# Altium PCB transfer.PcbDoc
Units mil, origin at the board's own origin, x right, y up, seen from the top; angles counter-clockwise.
Board outline 2680 x 2845 mil, 2 copper layers (Top Layer, Bottom Layer); 10 components, 119 nets, 256 pads, 133 vias.
Unrouted connection lines stored in the file: 24.
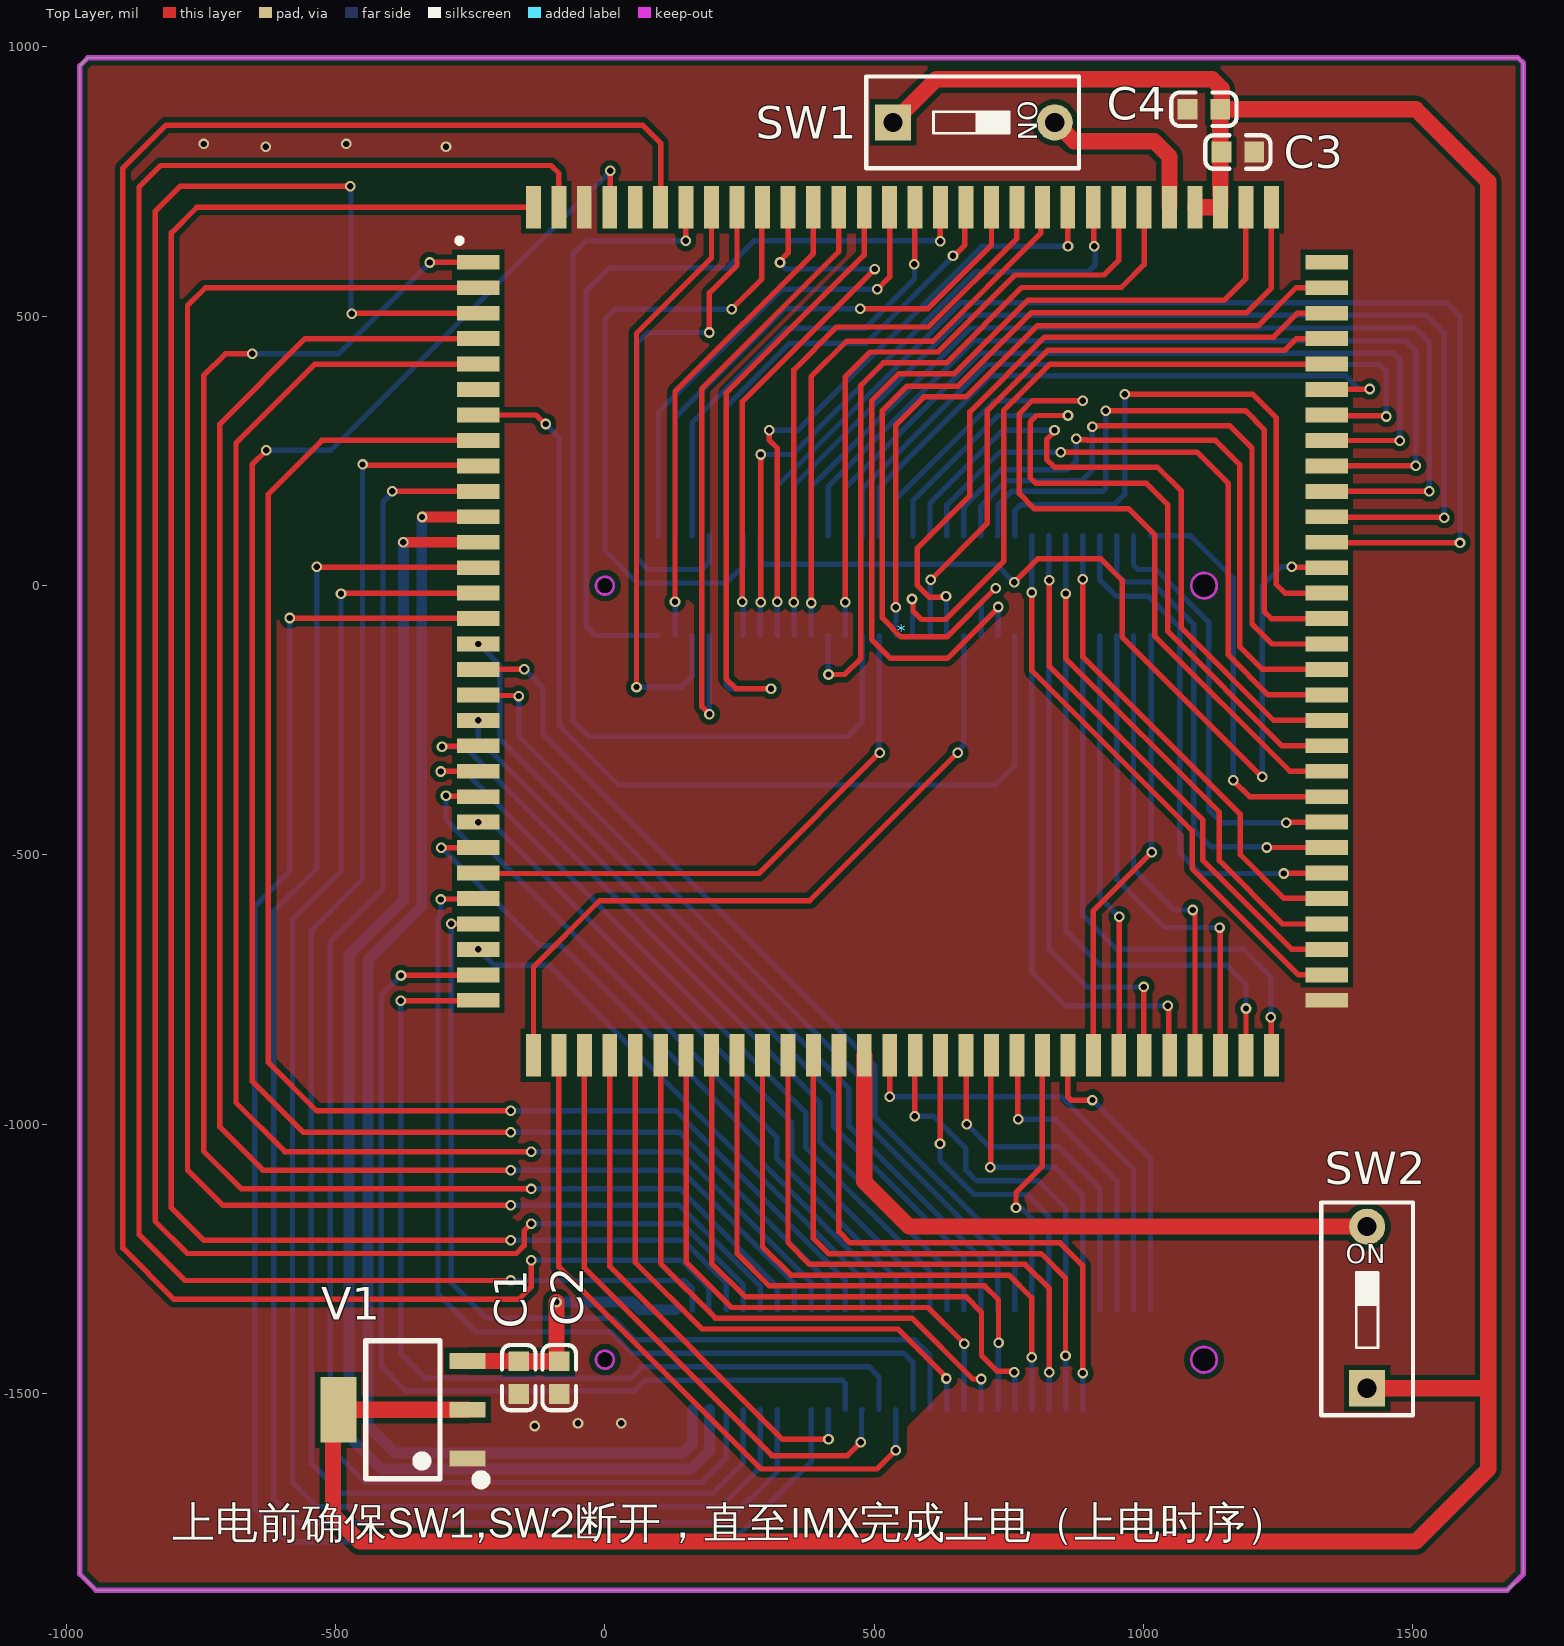
[diagram p0: Top Layer view]
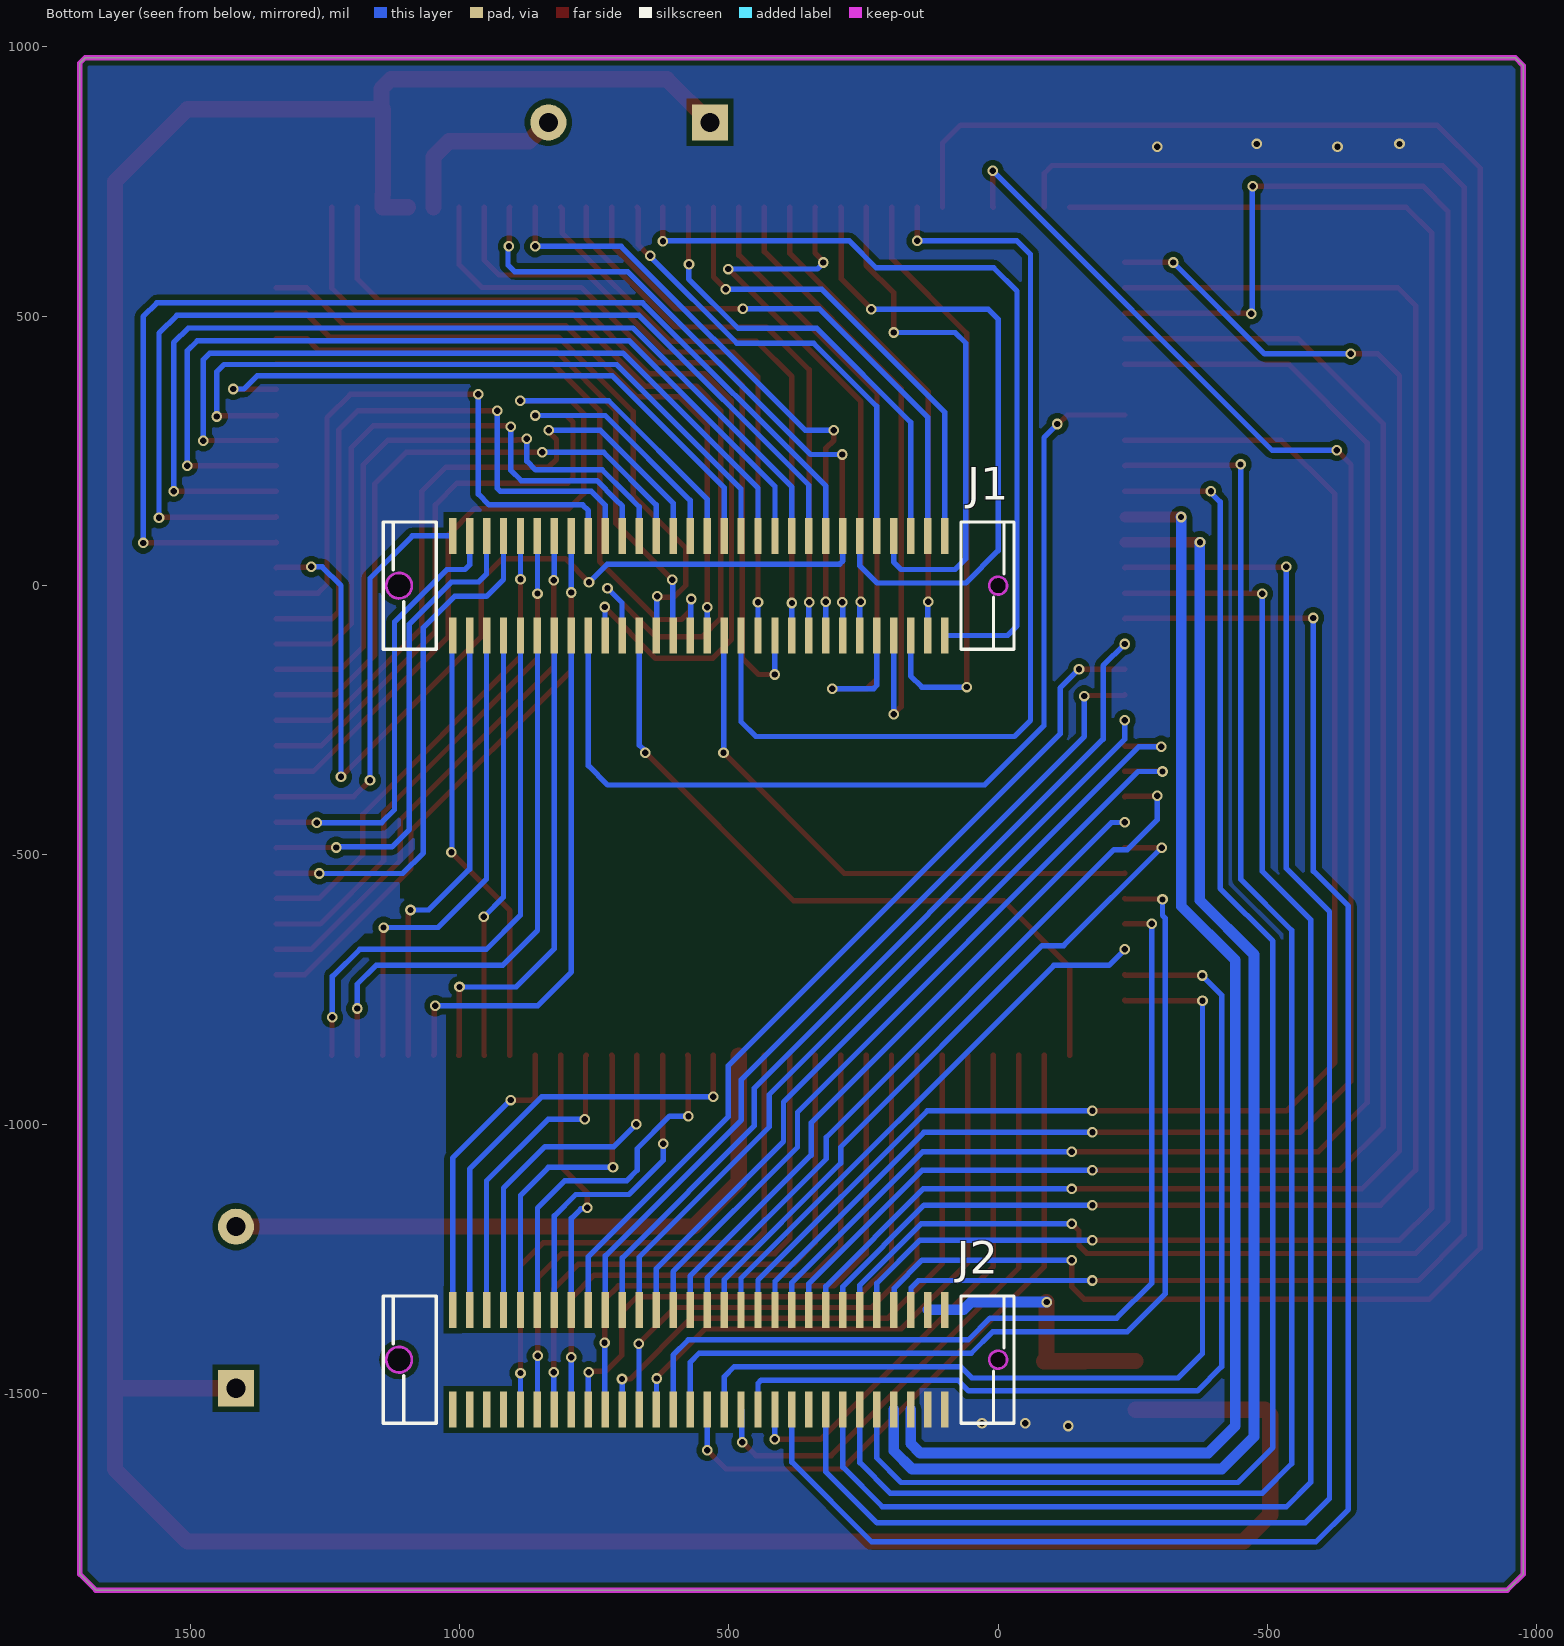
[diagram p1: Bottom Layer view, seen from below]
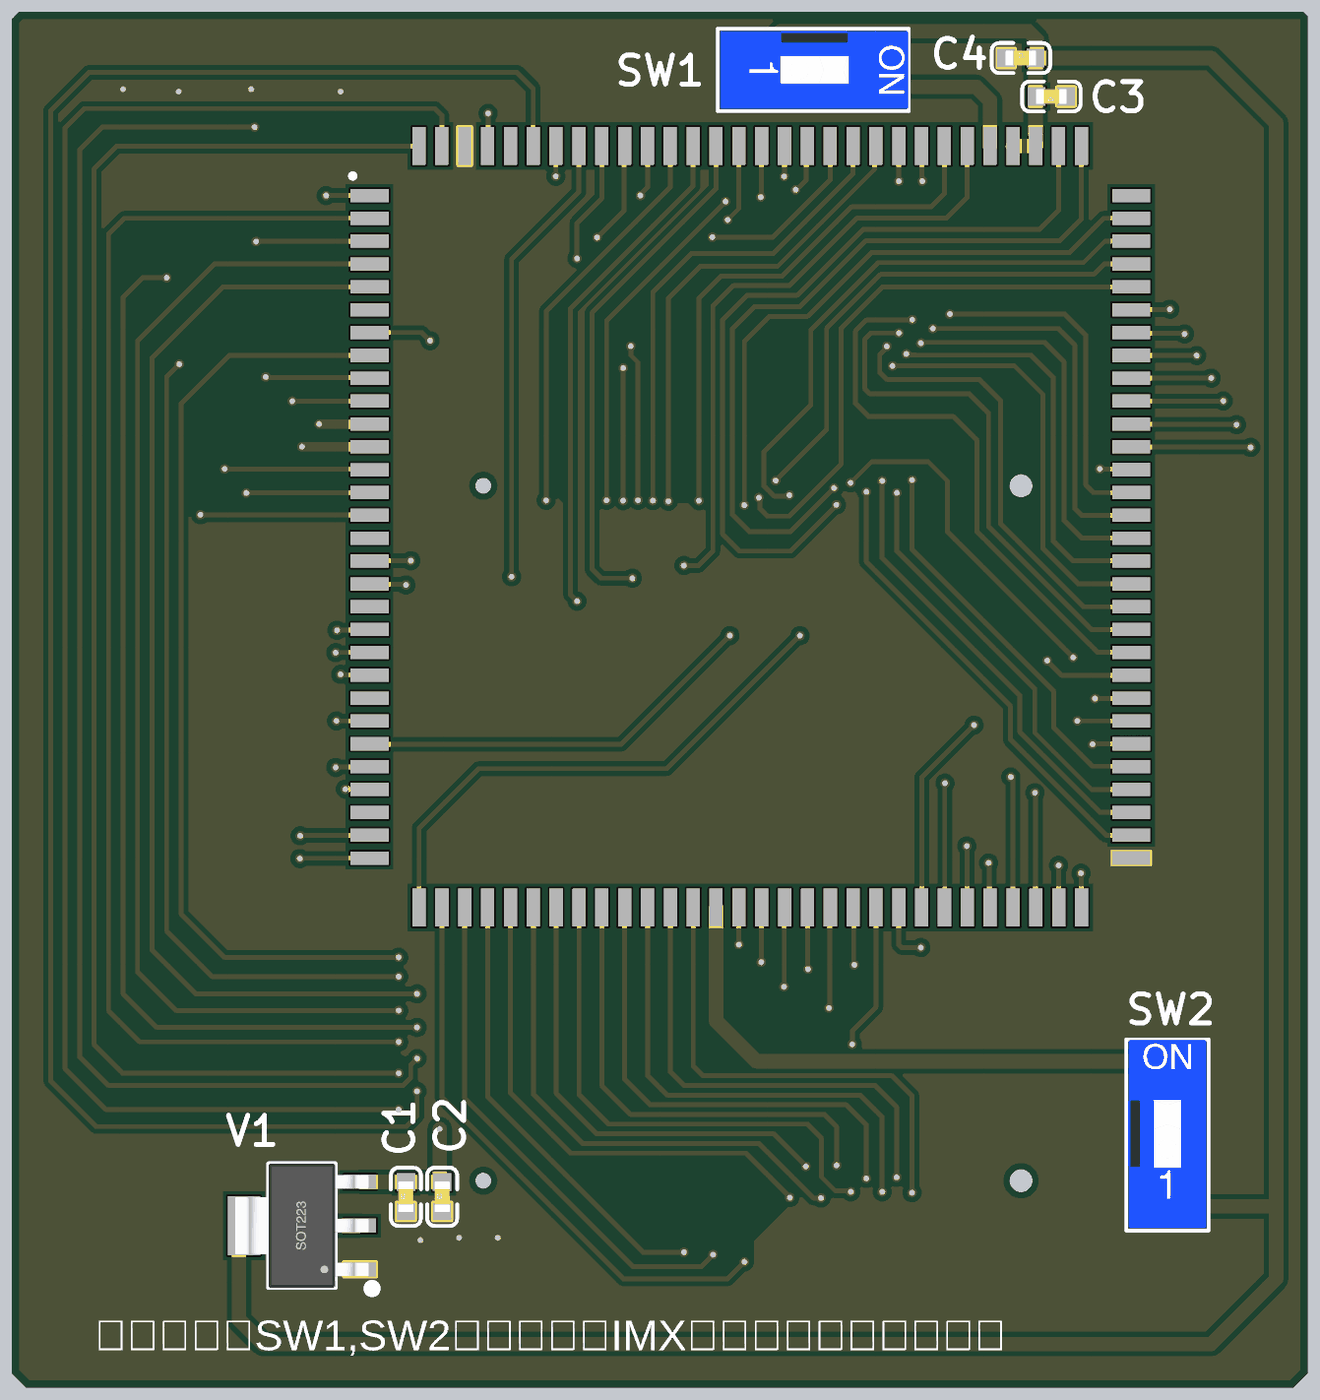
[diagram p2: 3D render of the assembled board from above, using the file's embedded part models]

## Layer stack, top to bottom
Top Solder: solder mask 0.4, Solder Resist, Dk 3.5
Top Layer: signal copper 1.4
Dielectric 1: dielectric 12.6, FR-4, Dk 4.8
Bottom Layer: signal copper 1.4
Bottom Solder: solder mask 0.4, Solder Resist, Dk 3.5

## Board outline
-975,-1835 -975,965 -960,980 1695,980 1705,970 1705,-1835 1675,-1865 -945,-1865
cut-out: -16.54,0 ccw(c0,0) 0,-16.54 ccw(c0,0) 16.54,0 ccw(c0,0) 0,16.54 ccw(c0,0)
cut-out: 1088.4,0 ccw(c1112.2,0) 1112.2,-23.8 ccw(c1112.2,0) 1136,0 ccw(c1112.2,0) 1112.2,23.8 ccw(c1112.2,0)
cut-out: -16.54,-1437.01 ccw(c0,-1437.01) 0,-1453.54 ccw(c0,-1437.01) 16.54,-1437.01 ccw(c0,-1437.01) 0,-1420.47 ccw(c0,-1437.01)
cut-out: 1088.4,-1437.01 ccw(c1112.2,-1437.01) 1112.2,-1460.81 ccw(c1112.2,-1437.01) 1136,-1437.01 ccw(c1112.2,-1437.01) 1112.2,-1413.21 ccw(c1112.2,-1437.01)

## Design rules (kind name [scope] priority, off if disabled: settings)
Clearance [All] p1: gap=10 ignorepadtopadclearanceinfootprint=FALSE except(0: Arc-Hole Track-Hole SMDPad-Hole THPad-Hole Via-Hole Fill-Hole Poly-Hole Region-Hole Text-Hole)
HoleToHoleClearance [All] p1: gap=6 allowstackedmicrovias=TRUE
MinimumSolderMaskSliver [All] p1: minsoldermaskwidth=6
PolygonConnect [All] p1: thpad.connectstyle=Relief thpad.reliefconductorwidth=10 thpad.reliefentries=4 thpad.polygonreliefangle="90 Angle" thpad.airgapwidth=10 smdpad.connectstyle=Direct smdpad.reliefconductorwidth=10 smdpad.reliefentries=4 smdpad.polygonreliefangle="90 Angle" smdpad.airgapwidth=10 via.connectstyle=Direct via.reliefconductorwidth=10 via.reliefentries=4 via.polygonreliefangle="90 Angle" via.airgapwidth=10
RoutingVias [All] p1: holewidth=28 width=50 viastyle="Through Hole" minholewidth=28 minwidth=50 maxholewidth=28 maxwidth=50
SilkToSilkClearance [All] p1: silktosilkclearance=6
SilkToSolderMaskClearance [IsPad] p1: minsilkscreentomaskgap=6 clearancetoexposedcopper=TRUE
SolderMaskExpansion [All] p1: expansion=4 istentingtop=FALSE
Width [All] p1: maxlimit=50 minlimit=10 preferedwidth=10
26 further rules are at their usual default settings.

## Components (designator, comment, footprint, x,y, rotation, side; value= is the part's Value field where it differs from the comment)
* "Connector_stamp_imx6ull" Connector_stamp_imx6ull 640,-20 r270 top locked
C1 "1uF" 0603_C_STD -160,-1470.32 r90 top
C2 "0.1uF" 0603_C_STD -85,-1470.32 r90 top
C3 "1uF" 0603_C_STD 1175,805 r180 top
C4 "0.1uF" 0603_C_STD 1111.93,884.46 r0 top
J1 "3710M060046G3FT01" 3710F060046G3FT01 99.41,-92.52 r270 bottom
J2 "3710M060046G3FT01" 3710F060046G3FT01 99.41,-1529.53 r270 bottom
SW1 "CSW-1P" "CSW DIP-1P" 685,860 r270 top
SW2 "CSW-1P" "CSW DIP-1P" 1415,-1340 r0 top
V1 "AMS1117-3V3" SOT223_L -375,-1530 r90 top

## Footprints (in the part's own frame and the unit in brackets; to place one, negate y for a bottom-side part, rotate by r counter-clockwise, add the part's x,y. Pads: shape width x height; smd on the part's side, far side on the other; paste and mask are expansions set on the pad)
0603_C_STD [mm]
  rect 0.93x0.98 smd: 1(-0.77,0) 2(0.77,0)
  silkscreen extent -1.53,-0.79 1.54,0.79, body extent -0.8,-0.4 0.8,0.4, height 0.3
3710F060046G3FT01 [mm]
  rect 1.7x0.35 smd: 1(-4.7,0) 2(-4.7,-0.8) 3(-4.7,-1.6) 4(-4.7,-2.4) 5(-4.7,-3.2) 6(-4.7,-4) 7(-4.7,-4.8) 8(-4.7,-5.6) 9(-4.7,-6.4) 10(-4.7,-7.2) 11(-4.7,-8) 12(-4.7,-8.8) 13(-4.7,-9.6) 14(-4.7,-10.4) 15(-4.7,-11.2) 16(-4.7,-12) 17(-4.7,-12.8) 18(-4.7,-13.6) 19(-4.7,-14.4) 20(-4.7,-15.2) 21(-4.7,-16) 22(-4.7,-16.8) 23(-4.7,-17.6) 24(-4.7,-18.4) 25(-4.7,-19.2) 26(-4.7,-20) 27(-4.7,-20.8) 28(-4.7,-21.6) 29(-4.7,-22.4) 30(-4.7,-23.2) 31(0,-23.2) 32(0,-22.4) 33(0,-21.6) 34(0,-20.8) 35(0,-20) 36(0,-19.2) 37(0,-18.4) 38(0,-17.6) 39(0,-16.8) 40(0,-16) 41(0,-15.2) 42(0,-14.4) 43(0,-13.6) 44(0,-12.8) 45(0,-12) 46(0,-11.2) 47(0,-10.4) 48(0,-9.6) 49(0,-8.8) 50(0,-8) 51(0,-7.2) 52(0,-6.4) 53(0,-5.6) 54(0,-4.8) 55(0,-4) 56(0,-3.2) 57(0,-2.4) 58(0,-1.6) 59(0,-0.8) 60(0,0)
  Keep-Out Layer circle w0.127: c-2.35,-25.725 r0.6
  Keep-Out Layer circle w0.127: c-2.35,2.525 r0.42
  silkscreen extent -5.35,-26.47 0.65,3.27
Connector_stamp_imx6ull [mm]
  rect 0.7x2 smd: J1_1(-15.755,-22.227) J1_2(-14.555,-22.227) J1_3(-13.355,-22.227) J1_4(-12.155,-22.227) J1_5(-10.955,-22.227) J1_6(-9.755,-22.227) J1_7(-8.555,-22.227) J1_8(-7.355,-22.227) J1_9(-6.155,-22.227) J1_10(-4.955,-22.227) J1_11(-3.755,-22.227) J1_12(-2.555,-22.227) J1_13(-1.355,-22.227) J1_14(-0.155,-22.227) J1_15(1.045,-22.227) J1_16(2.245,-22.227) J1_17(3.445,-22.227) J1_18(4.645,-22.227) J1_19(5.845,-22.227) J1_20(7.045,-22.227) J1_21(8.245,-22.227) J1_22(9.445,-22.227) J1_23(10.645,-22.227) J1_24(11.845,-22.227) J1_25(13.045,-22.227) J1_26(14.245,-22.227) J1_27(15.445,-22.227) J1_28(16.645,-22.227) J1_29(17.845,-22.227) J1_30(19.045,-22.227) J3_1(19.045,17.777) J3_2(17.845,17.777) J3_3(16.645,17.777) J3_4(15.445,17.777) J3_5(14.245,17.777) J3_6(13.045,17.777) J3_7(11.845,17.777) J3_8(10.645,17.777) J3_9(9.445,17.777) J3_10(8.245,17.777) J3_11(7.045,17.777) J3_12(5.845,17.777) J3_13(4.645,17.777) J3_14(3.445,17.777) J3_15(2.245,17.777) J3_16(1.045,17.777) J3_17(-0.155,17.777) J3_18(-1.355,17.777) J3_19(-2.555,17.777) J3_20(-3.755,17.777) J3_21(-4.955,17.777) J3_22(-6.155,17.777) J3_23(-7.355,17.777) J3_24(-8.555,17.777) J3_25(-9.755,17.777) J3_26(-10.955,17.777) J3_27(-12.155,17.777) J3_28(-13.355,17.777) J3_29(-14.555,17.777) J3_30(-15.755,17.777)
  rect 2x0.7 smd: J2_1(21.642,-19.627) J2_2(21.642,-18.427) J2_3(21.642,-17.227) J2_4(21.642,-16.027) J2_5(21.642,-14.827) J2_6(21.642,-13.627) J2_7(21.642,-12.427) J2_8(21.642,-11.227) J2_9(21.642,-10.027) J2_10(21.642,-8.827) J2_11(21.642,-7.627) J2_12(21.642,-6.427) J2_13(21.642,-5.227) J2_14(21.642,-4.027) J2_15(21.642,-2.827) J2_16(21.642,-1.627) J2_17(21.642,-0.427) J2_18(21.642,0.773) J2_19(21.642,1.973) J2_20(21.642,3.173) J2_21(21.642,4.373) J2_22(21.642,5.573) J2_23(21.642,6.773) J2_24(21.642,7.973) J2_25(21.642,9.173) J2_26(21.642,10.373) J2_27(21.642,11.573) J2_28(21.642,12.773) J2_29(21.642,13.973) J2_30(21.642,15.173) J4_1(-18.352,15.169) J4_2(-18.352,13.969) J4_3(-18.352,12.769) J4_4(-18.352,11.569) J4_5(-18.352,10.369) J4_6(-18.352,9.169) J4_7(-18.352,7.969) J4_8(-18.351,6.769) J4_9(-18.351,5.569) J4_10(-18.351,4.369) J4_11(-18.351,3.169) J4_12(-18.351,1.969) J4_13(-18.351,0.769) J4_14(-18.351,-0.431) J4_15(-18.351,-1.631) J4_16(-18.351,-2.831) J4_17(-18.351,-4.031) J4_18(-18.351,-5.231) J4_19(-18.351,-6.431) J4_20(-18.351,-7.631) J4_21(-18.351,-8.831) J4_22(-18.351,-10.031) J4_23(-18.351,-11.231) J4_24(-18.351,-12.431) J4_25(-18.351,-13.631) J4_26(-18.351,-14.831) J4_27(-18.351,-16.031) J4_28(-18.351,-17.231) J4_29(-18.351,-18.431) J4_30(-18.351,-19.631)
  silkscreen extent -16.89,-23.23 -16.66,-23
"CSW DIP-1P" [mm] "4.1*9.9*7mm"
  rect 1.7x1.7 hole 0.9: 1(0,-3.81)
  round 1.7 hole 0.9: 2(0,3.81)
  silkscreen extent -2.16,-5.08 2.16,4.95, body extent -2.05,-4.95 2.05,4.95, height 6.65
SOT223_L [mm] "6.4x7x1.6mm(长宽高)"
  rect 0.75x1.7 smd: 1(-2.3,-3.048) 2(0,-3.048) 3(2.3,-3.048)
  rect 3.1x1.7 smd: 2(0,3.048)
  silkscreen extent -3.5,-3.88 3.25,1.75, body extent -3.25,-3.51 3.25,3.51, height 1.65

## Part data
C1 C2 C3 C4: library part 0603_C_STD, "贴片电容", Package=0603, SuppliersPartNumber=C1685, ComponentLink1Description=供应商链接, ComponentLink1URL=http://www.szlcsc.com/product/details_2037.html, Supplier=LC
J1 J2: library part 3710F, "3710F060046G3FT01"
SW1 SW2: "1路编码开关", BOM名称=1路编码开关, 学习资源=www.ooocke.com, 版权归属=源创客
V1: library part AMS1117, "三端稳压芯片", BOM名称=稳压芯片, 学习资源=www.ooocke.com, 版权归属=源创客

## Via types
v1: diameter 19.68, hole 11.81, Top Layer to Bottom Layer, tented both sides, 133 vias

## Nets (pads, with @x,y where several pads share a name; then routed paths per layer and width w, separated by ;. In a path a pad name is that pad's centre, name@x,y a point inside that pad or via, vN(x,y) a via of type N, cw(c..) or ccw(c..) an arc to the next point about the centre after c; other vN are vias at no path point)
BOOT_MODE0: *.J1_2 J2.7 | length 3354.9
  Top Layer w10: *.J1_2 -741.97,553.03 -775,520 -775,-1085 -710,-1150 v1(-175,-1150)
  Bottom Layer w10: v1(-175,-1150) 137.33,-1150 288.39,-1301.05 J2.7
BOOT_MODE1: *.J1_1 J2.8 | length 3249.5
  Top Layer w10: v1(-654.75,430.25) -704.75,430.25 -745,390 -745,-1050 -675,-1120 v1(-136.92,-1120) ; v1(-325,600) -324.72,600.28 *.J1_1
  Bottom Layer w10: v1(-654.75,430.25) -494.75,430.25 v1(-325,600) ; v1(-136.92,-1120) 139.14,-1120 319.88,-1300.74 J2.8
CSI_DATA0: *.J4_17 J1.56 | length 1250.6
  Top Layer w10: v1(308.32,-191.14) 243.11,-191.14 225,-173.03 225,357.24 481.32,613.55 *.J4_17
  Bottom Layer w10: J1.56 225.39,-185.28 231.25,-191.14 v1(308.32,-191.14)
CSI_DATA1: *.J4_18 J1.57 | length 1198.4
  Top Layer w10: v1(193.99,-238.66) 180,-224.66 180,366.09 434.07,620.16 *.J4_18
  Bottom Layer w10: J1.57 193.94,-92.57 193.94,-238.61 v1(193.99,-238.66)
CSI_DATA2: *.J4_15 J1.3 | length 867.2
  Top Layer w10: v1(574.01,596.91) 574.91,597.81 574.91,701.6 *.J4_15
  Bottom Layer w10: J1.3 162.4,303.34 336.56,477.5 482.5,477.5 574.59,569.59 574.59,596.33 v1(574.01,596.91)
CSI_DATA3: *.J4_19 J1.59 | length 901.8
  Top Layer w10: v1(130,-30.21) 130,360.06 386.83,616.89 *.J4_19
  Bottom Layer w10: v1(130,-30.21) 130.45,-30.66 130.45,-92.07 J1.59
CSI_DATA4: *.J4_20 J1.55 | length 1073.8
  Top Layer w10: v1(255,-30) 255,341.77 v1(500.97,587.74) ; v1(325,600) 325,602.62 340,617.62 340,702.08 *.J4_20
  Bottom Layer w10: v1(255,-30) 256.89,-31.89 J1.55 ; v1(325,600) 325,598.44 335.7,587.74 v1(500.97,587.74)
CSI_DATA5: *.J4_21 J1.6 | length 1236.2
  Top Layer w10: v1(235.43,513.45) 291.17,569.18 291.17,701.33 *.J4_21
  Bottom Layer w10: v1(235.43,513.45) 18.58,513.45 0,494.87 0,65 60,5 225,5 256.89,36.89 J1.6
CSI_DATA6: *.J4_22 J1.4 | length 992.4
  Top Layer w10: v1(193.81,469.98) 193.81,543.5 245.05,594.74 245.05,702.45 *.J4_22
  Bottom Layer w10: v1(193.81,469.98) 79.98,469.98 60,450 60,50 80,30 180,30 193.9,43.9 J1.4
CSI_DATA7: *.J4_23 J1.58 | length 1136
  Top Layer w10: v1(58.54,-188.28) 58.54,468.54 197.85,607.85 *.J4_23
  Bottom Layer w10: v1(58.54,-188.28) 141.72,-188.28 162.4,-167.6 J1.58
CSI_HSYNC: *.J4_16 J1.1 | length 892.1
  Top Layer w10: v1(505.51,550) 528.56,573.05 *.J4_16
  Bottom Layer w10: J1.1 99.41,322.02 327.39,550 v1(505.51,550)
CSI_MCLK: *.J4_12 J1.2 | length 1009.4
  Top Layer w10: v1(473.83,514) 599,514 717.54,632.54 *.J4_12
  Bottom Layer w10: J1.2 130.91,312.92 331.98,514 v1(473.83,514)
CSI_PIXCLK: *.J4_13 J1.5 | length 878.7
  Top Layer w10: v1(646.09,612.17) 647.78,612.17 668.04,632.42 668.04,700.24 *.J4_13
  Bottom Layer w10: J1.5 225.39,332.91 342.49,450 485,450 646.09,611.09 v1(646.09,612.17)
CSI_VSYNC: *.J4_14 J1.60 | length 1522.7
  Top Layer w10: v1(622.36,639.65) 622.7,639.99 622.7,702.16 *.J4_14
  Bottom Layer w10: J1.60 -17.48,-92.52 -35,-75 -35,546.76 8.24,590 226.36,590 276.36,640 622.01,640 v1(622.36,639.65)
DC5V: C1.2 C2.2 J2.1 J2.2 V1.3 | length 509.2
  Top Layer w30: V1.3 -160.55,-1439.45 C1.2 C2.2 -90,-1435 v1(-90,-1330)
  Bottom Layer w20: v1(-90,-1330) 50,-1330 64.49,-1344.49 J2.1 J2.2
ENET1_CRS_DV: *.J2_16 J2.25 | length 676.8
  Top Layer w10: v1(575,-985) 575.48,-984.52 575.48,-872.54 *.J2_16
  Bottom Layer w10: v1(575,-985) 610,-985 670,-1045 670,-1085 689.84,-1104.84 804.84,-1104.84 855.31,-1155.31 J2.25
ENET1_RXD0: *.J2_19 J2.26 | length 615
  Top Layer w10: v1(715,-1080) 716.34,-1078.66 716.34,-873.41 *.J2_19
  Bottom Layer w10: v1(715,-1080) 835,-1080 886.81,-1131.81 J2.26
ENET1_RXD1: *.J2_17 J2.24 | length 614.5
  Top Layer w10: v1(621.95,-1035.79) 622.57,-1035.17 622.57,-872.69 *.J2_17
  Bottom Layer w10: v1(621.95,-1035.79) 621.95,-1066.95 685.32,-1130.32 784.2,-1130.32 823.82,-1169.94 J2.24
ENET1_RXER: *.J2_22 J2.30 | length 559.2
  Top Layer w10: *.J2_22 859.42,-949.14 865.28,-955 v1(905,-955)
  Bottom Layer w10: v1(905,-955) 1012.8,-1062.8 J2.30
ENET1_TX_CLK: *.J2_15 J2.29 | length 848.2
  Top Layer w10: *.J2_15 v1(528.71,-948.71) v1@530,-950
  Bottom Layer w10: v1(528.71,-948.71) 847,-948.71 981.3,-1083.02 J2.29
ENET1_TXD0: *.J2_21 J2.23 | length 510.6
  Top Layer w10: v1(763.13,-1155.16) 763.13,-1126.87 812.18,-1077.82 *.J2_21
  Bottom Layer w10: v1(763.13,-1155.16) 764.98,-1157.01 774.83,-1157.01 792.32,-1174.5 J2.23
ENET1_TXD1: *.J2_20 J2.28 | length 589.1
  Top Layer w10: *.J2_20 766.15,-873.28 766.15,-989.54 v1(767.36,-990.75)
  Bottom Layer w10: v1(767.36,-990.75) 835.75,-990.75 949.8,-1104.8 J2.28
ENET1_TXEN: *.J2_18 J2.27 | length 650
  Top Layer w10: *.J2_18 671.05,-872.67 671.05,-998.97 v1(671.65,-999.57)
  Bottom Layer w10: v1(671.65,-999.57) 713.4,-1041.32 841.32,-1041.32 918.31,-1118.31 J2.27
ENET2_CRS_DV: *.J2_28 J1.33 | length 918.8
  Top Layer w10: v1(1141.01,-634.75) 1141.95,-635.68 1141.95,-871.13 *.J2_28
  Bottom Layer w10: J1.33 949.8,-544.8 1039.75,-634.75 v1(1141.01,-634.75)
ENET2_RXD0: *.J2_26 J1.38 | length 996.9
  Top Layer w10: v1(1045,-780) 1046.7,-781.7 1046.7,-870.37 *.J2_26
  Bottom Layer w10: J1.38 792.32,-717.32 855,-780 v1(1045,-780)
ENET2_RXD1: *.J2_25 J1.37 | length 914.5
  Top Layer w10: v1(1000,-745) 1000.58,-745.58 1000.58,-871.49 *.J2_25
  Bottom Layer w10: J1.37 823.82,-673.82 895,-745 v1(1000,-745)
ENET2_RXER: *.J2_24 J1.34 | length 795.2
  Top Layer w10: *.J2_24 954.45,-871.52 954.45,-615.55 v1(955,-615)
  Bottom Layer w10: J1.34 918.31,-578.31 v1(955,-615)
ENET2_TX_CLK: *.J2_23 J1.31 | length 825.3
  Top Layer w10: *.J2_23 906.66,-603.34 v1(1015,-495)
  Bottom Layer w10: J1.31 1013.9,-93.62 1013.9,-493.9 v1(1015,-495)
ENET2_TXD0: *.J2_29 J1.36 | length 1055.9
  Top Layer w10: v1(1190,-785) 1190.13,-785.13 *.J2_29
  Bottom Layer w10: J1.36 855.32,-640.32 920,-705 1155,-705 1190,-740 v1(1190,-785)
ENET2_TXD1: *.J2_30 J1.35 | length 1063.1
  Top Layer w10: v1(1236.24,-801.29) 1236.8,-801.86 1236.8,-871.5 *.J2_30
  Bottom Layer w10: J1.35 886.81,-611.81 950,-675 1185,-675 1235,-725 1236.24,-725 v1(1236.24,-801.29)
ENET2_TXEN: *.J2_27 J1.32 | length 846.7
  Top Layer w10: v1(1090.99,-602.21) 1090.99,-604.83 1095.32,-609.16 1095.32,-871.75 *.J2_27
  Bottom Layer w10: J1.32 981.3,-526.3 1057.21,-602.21 v1(1090.99,-602.21)
ENET_MDC: *.J1_26 J2.45 | length 1827.3
  Top Layer w10: v1(-305.16,-582.54) -304.3,-581.68 -235.95,-581.68 *.J1_26
  Bottom Layer w10: v1(-305.16,-582.54) -305.16,-612.3 -310,-617.14 -310,-1315 -240,-1385 10,-1385 50,-1425 555,-1425 571.85,-1441.85 J2.45
ENET_MDIO: *.J1_27 J2.44 | length 1762.7
  Top Layer w10: v1(-285.16,-627.43) -284.84,-627.75 -235.42,-627.75 *.J1_27
  Bottom Layer w10: v1(-285.16,-627.43) -285.16,-1294.84 -220,-1360 15,-1360 55,-1400 575,-1400 603.35,-1428.35 J2.44
GND: *.J3_1 *.J4_28 C1.1 C2.1 C3.1 C4.1 J2.59 J2.60 V1.1
  other v1: -130,-1560 -50,-1555 30,-1555 -630,815 -295,815 -745,820 -480,820
GPIO1_IO05: *.J1_25 J1.47 | length 1056.2
  Top Layer w10: *.J1_25 -234.39,-534.29 285.71,-534.29 v1(510,-310)
  Bottom Layer w10: J1.47 509.43,-93.09 509.43,-309.43 v1(510,-310)
GPIO1_IO08: *.J1_23 J2.16 | length 1253.8
  Bottom Layer w10: v1(-235.1,-439.09) -234.44,-439.75 -210.25,-439.75 347.21,-997.21 347.21,-1057.21 571.85,-1281.85 J2.16
JTAG_MOD: *.J1_17 J2.22 | length 1652.1
  Top Layer w10: *.J1_17 -234.78,-155.31 -150.31,-155.31 v1(-150,-155)
  Bottom Layer w10: v1(-150,-155) -115,-190 -115,-275 500.76,-890.76 500.76,-985.76 760.83,-1245.83 J2.22
JTAG_nTRST: *.J1_18 J2.21 | length 1583.8
  Top Layer w10: *.J1_18 -234.03,-203.94 -161.06,-203.94 v1(-160,-205)
  Bottom Layer w10: v1(-160,-205) -160,-280 476.9,-916.9 476.9,-991.9 729.33,-1244.33 J2.21
JTAG_TCK: *.J1_19 J2.19 | length 1467.8
  Bottom Layer w10: v1(-235.1,-250.12) -235.1,-284.9 425.02,-945.02 425.02,-1005.02 666.34,-1246.34 J2.19
JTAG_TDI: *.J1_21 J2.17 | length 1472.5
  Top Layer w10: v1(-305.16,-345) -304.96,-344.8 -235.29,-344.8 *.J1_21
  Bottom Layer w10: v1(-305.16,-345) -260,-345 372.63,-977.63 372.63,-1042.63 603.35,-1273.35 J2.17
JTAG_TDO: *.J1_20 J2.18 | length 1526.4
  Top Layer w10: v1(-302.55,-298.84) -301.81,-298.1 -235.84,-298.1 *.J1_20
  Bottom Layer w10: v1(-302.55,-298.84) -261.16,-298.84 398.57,-958.57 398.57,-1031.89 635,-1268.33 635,-1344.33 J2.18
JTAG_TMS: *.J1_16 J2.20 | length 1622.5
  Bottom Layer w10: v1(-235.1,-108.39) -195,-148.48 -195,-285 452.52,-932.52 452.52,-1002.52 697.83,-1247.83 J2.20
LCD_BL: *.J3_30
LCD_DATA0: *.J3_18 J1.7 | length 1732.3
  Top Layer w10: v1(759.59,6.05) 803.54,50 920,50 960,10 960,-95 v1(1220,-355) ; v1(1275,35) 1275.82,34.18 1339.05,34.18 *.J3_18
  Bottom Layer w10: J1.7 288.39,45.86 294.24,40 725.64,40 v1(759.59,6.05) ; v1(1220,-355) 1220,0 1255,35 v1(1275,35)
LCD_DATA1: *.J3_19 J1.8 | length 2179.5
  Top Layer w10: *.J3_19 1340.52,79.95 1586.69,79.95 v1(1587.34,79.29)
  Bottom Layer w10: J1.8 319.88,184.88 660,525 1561.89,525 1587.34,499.55 v1(1587.34,79.29)
LCD_DATA2: *.J3_20 J1.9 | length 2005.6
  Top Layer w10: *.J3_20 1340.63,127.09 1557.05,127.09 v1(1557.81,126.32)
  Bottom Layer w10: J1.9 351.38,186.38 666.72,501.72 1524.87,501.72 1557.81,468.78 v1(1557.81,126.32)
LCD_DATA3: *.J3_21 J1.10 | length 1838.4
  Top Layer w10: *.J3_21 1340.01,175.24 1530.42,175.24 v1(1530.57,175.39)
  Bottom Layer w10: J1.10 382.87,182.87 678.35,478.35 1503.53,478.35 1530.57,451.31 v1(1530.57,175.39)
LCD_DATA4: *.J3_22 J1.11 | length 1681.6
  Top Layer w10: *.J3_22 1339.96,222.43 1505.45,222.43 v1(1505.54,222.53)
  Bottom Layer w10: J1.11 414.37,184.37 684.42,454.42 1486.92,454.42 1505.54,435.79 v1(1505.54,222.53)
LCD_DATA5: *.J3_23 J1.12 | length 1512.8
  Top Layer w10: *.J3_23 1340,269.45 1475.33,269.45 v1(1475.46,269.32)
  Bottom Layer w10: J1.12 445.87,180.87 696.6,431.6 1463.47,431.6 1475.46,419.6 v1(1475.46,269.32)
LCD_DATA6: *.J3_24 J1.13 | length 1356.4
  Top Layer w10: *.J3_24 1341.3,315.39 1449.08,315.39 v1(1450.51,313.96)
  Bottom Layer w10: J1.13 477.36,179.58 708.23,410.45 1437.31,410.45 1450.51,397.25 v1(1450.51,313.96)
LCD_DATA7: *.J3_25 J1.14 | length 1177.6
  Top Layer w10: *.J3_25 1340.33,364.54 1419.54,364.54 v1(1420,365)
  Bottom Layer w10: J1.14 508.86,182.05 716.65,389.84 1375.16,389.84 1400,365 v1(1420,365)
LCD_DATA8: *.J3_10 J1.15 | length 1661.5
  Top Layer w10: v1(887.33,343.23) 793.23,343.23 769.33,319.33 769.33,170.67 796.93,143.07 971.95,143.07 1020.86,94.17 1020.86,-94.01 1271.44,-344.59 *.J3_10
  Bottom Layer w10: J1.15 540.35,160.67 722.91,343.23 v1(887.33,343.23)
LCD_DATA9: *.J3_11 J1.16 | length 1492.1
  Top Layer w10: v1(859.68,315.94) 801.57,315.94 789.33,303.69 789.33,200.27 799.23,190.36 1004.64,190.36 1045,150 1045,-85.03 1257.31,-297.35 *.J3_11
  Bottom Layer w10: J1.16 571.85,158.32 729.47,315.94 v1(859.68,315.94)
LCD_DATA10: *.J3_12 J1.17 | length 1276.3
  Top Layer w10: v1(834.55,288.29) 834.55,285.67 820,271.12 820,234.48 834.48,220 1025.31,220 1070,175.31 1070,-78.47 1241.63,-250.1 *.J3_12
  Bottom Layer w10: J1.17 603.35,153.35 738.29,288.29 v1@833.89,288.29
LCD_DATA11: *.J3_13 J1.18 | length 1176.1
  Top Layer w10: v1(846.33,247.64) 846.5,247.81 1098.74,247.81 1157.22,189.33 1157.22,-128.85 1231.23,-202.86 *.J3_13
  Bottom Layer w10: J1.18 634.84,149.96 732.52,247.64 v1(846.33,247.64)
LCD_DATA12: *.J3_14 J1.19 | length 1179.3
  Top Layer w10: v1(875,272.66) 876.85,270.8 894.07,270.8 894.87,270 1132.92,270 1178.78,224.14 1178.78,-113.78 1220,-155 1339.25,-155 *.J3_14
  Bottom Layer w10: J1.19 666.34,146.34 690,170 735,215 858.83,215 875,231.17 v1(875,272.66)
LCD_DATA13: *.J3_15 J1.20 | length 1165.2
  Top Layer w10: v1(905,295) 906.57,296.57 1160.25,296.57 1201.2,255.61 1201.2,-71.2 1238.37,-108.37 *.J3_15
  Bottom Layer w10: J1.20 697.83,147.83 710,160 745,195 885.43,195 905,214.57 v1(905,295)
LCD_DATA14: *.J3_16 J1.21 | length 1182.4
  Top Layer w10: v1(930,325) 1188.81,325 1223.91,289.9 1223.91,-48.05 1236.98,-61.13 *.J3_16
  Bottom Layer w10: J1.21 729.67,92.85 729.67,149.67 755,175 924.14,175 930,180.86 v1(930,325)
LCD_DATA15: *.J3_17 J1.22 | length 1157.5
  Top Layer w10: v1(965,355) 1202.79,355 1245.94,311.85 1245.94,2.59 1262.41,-13.88 *.J3_17
  Bottom Layer w10: J1.22 760.83,139.27 771.55,150 945,150 965,170 v1(965,355)
LCD_DATA16: *.J3_2 J1.23 | length 1075.8
  Top Layer w10: v1(792.32,-12.68) 792.32,-157.32 1090,-455 1090,-525 1287.54,-722.54 *.J3_2
  Bottom Layer w10: v1@790,-15 v1(792.32,-12.68) J1.23
LCD_DATA17: *.J3_3 J1.24 | length 1019.4
  Top Layer w10: v1(825,10) 825,-150 1110,-435 1110,-510 1275.3,-675.3 *.J3_3
  Bottom Layer w10: J1.24 823.82,11.18 v1(825,10)
LCD_DATA18: *.J3_4 J1.25 | length 969.2
  Top Layer w10: v1(855.32,-14.68) 855.32,-135.32 1140.67,-420.67 1140.67,-510.67 1258.06,-628.06 *.J3_4
  Bottom Layer w10: v1(855.32,-14.68) J1.25
LCD_DATA19: *.J3_5 J1.26 | length 907.3
  Top Layer w10: v1(886.81,11.81) 886.81,-131.81 1179.63,-424.63 1179.63,-499.63 1260,-580 1339.05,-580 *.J3_5
  Bottom Layer w10: v1(886.81,11.81) J1.26
LCD_DATA20: *.J3_6 J1.27 | length 974
  Top Layer w10: v1(1260.16,-534.46) 1260.61,-534.01 1339.42,-534.01 *.J3_6
  Bottom Layer w10: J1.27 918.31,11.69 950,-20 1009.41,-20 1067.21,-77.8 1067.21,-496.02 1105.65,-534.46 v1(1260.16,-534.46)
LCD_DATA21: *.J3_7 J1.28 | length 894.8
  Top Layer w10: v1(1228.7,-486.06) 1228.83,-486.19 1339.73,-486.19 *.J3_7
  Bottom Layer w10: J1.28 949.8,21.48 964.52,6.76 1015.01,6.76 1092.99,-71.22 1092.99,-452.5 1125.31,-484.81 1227.45,-484.81 v1(1228.7,-486.06)
LCD_DATA22: *.J3_8 J1.29 | length 815.5
  Top Layer w10: v1(1265,-440) 1265.46,-439.54 1339.4,-439.54 *.J3_8
  Bottom Layer w10: J1.29 981.3,38.7 990,30 1023.49,30 1120.6,-67.11 1120.6,-416.08 1144.52,-440 v1(1265,-440)
LCD_DATA23: *.J3_9 J1.30 | length 747.5
  Top Layer w10: v1(1166.24,-361.54) 1196.54,-391.84 *.J3_9
  Bottom Layer w10: J1.30 1087.48,92.52 1166.24,13.76 v1(1166.24,-361.54)
LCD_DE: *.J3_29 J1.46 | length 1296.3
  Top Layer w10: v1(540,-40) 540,298.28 592.08,350.37 670.37,350.37 802.23,482.23 1212.23,482.23 1283.05,553.05 *.J3_29
  Bottom Layer w10: v1(540,-40) 540.35,-40.35 J1.46
LCD_HSYNC: *.J3_27 J1.44 | length 1146.9
  Top Layer w10: v1(604.83,10.72) 710,115.89 710,325 822.3,437.3 1262.3,437.3 1283.56,458.56 *.J3_27
  Bottom Layer w10: J1.44 604.09,-91.78 604.09,9.97 v1(604.83,10.72)
LCD_PCLK: *.J3_26 J1.45 | length 1226.6
  Top Layer w10: v1(569.98,-24.7) 571.83,-26.56 571.83,-46.83 587.89,-62.89 632.11,-62.89 740,45 740,325 826.31,411.31 *.J3_26
  Bottom Layer w10: v1(569.98,-24.7) 570.92,-25.64 570.92,-91.58 J1.45
LCD_VSYNC: *.J3_28 J1.43 | length 1237.4
  Top Layer w10: 611.83,-21.42 601.83,-21.42 579.99,0.43 579.99,69.99 677.5,167.5 677.5,322.5 816.35,461.35 1241.35,461.35 1285.8,505.8 *.J3_28 ; 611.86,-21.39 631.26,-21.39 v1(633.11,-19.54)
  Bottom Layer w10: v1(633.11,-19.54) 633.98,-20.4 633.98,-91.66 J1.43
Net*_J4_5: *.J4_5 SW1.2 | length 333.4
  Top Layer w30: SW1.2 836.04,860 871.04,825 1019.45,825 1048.24,796.21 *.J4_5
ONOFF: *.J4_25 J2.4 | length 4418.4
  Top Layer w10: v1(-136.92,-1252.14) -136.92,-1301.92 -160,-1325 -800,-1325 -895,-1230 -895,775 -815,855 70,855 103.36,821.64 *.J4_25
  Bottom Layer w10: v1(-136.92,-1252.14) 141.04,-1252.14 192.86,-1303.96 192.86,-1343.45 J2.4
POR_B: *.J4_26
PWR_ON_EN: *.J4_1 J1.41 | length 1712.7
  Top Layer w10: v1(725.26,-4.87) 725.2,-4.87 635.07,-95 550,-95 515,-60 515,325 560.37,370.37 655.37,370.37 791.74,506.74 1191.74,506.74 1237.22,552.22 *.J4_1
  Bottom Layer w10: J1.41 698.36,-91.99 698.36,-31.77 v1(725.26,-4.87)
RESET: *.J4_2 J1.40 | length 1708
  Top Layer w10: v1(730.3,-39.57) 730.3,-40.73 636.03,-135 530,-135 495,-100 495,343.28 545.39,393.68 648.68,393.68 785,530 1150,530 1189.98,569.98 *.J4_2
  Bottom Layer w10: J1.40 729.81,-92.04 729.81,-40.06 v1(730.3,-39.57)
SD1_CLK: *.J4_8 J1.54 | length 1212.6
  Top Layer w10: v1(289.19,-30.81) 289.34,-30.66 289.34,243.26 v1(289.48,243.41) ; *.J4_8 907.38,701.63 907.38,630.71 v1(908.26,629.84)
  Bottom Layer w10: J1.54 288.39,-31.61 v1(289.19,-30.81) v1@290,-30 ; v1(289.48,243.41) 348.41,243.41 687.89,582.89 897.89,582.89 910,595 910,628.1 v1(908.26,629.84)
SD1_CMD: *.J4_9 J1.53 | length 1156.1
  Top Layer w10: v1(305.14,288.62) 305.14,269.86 319.88,255.12 v1(319.88,-30.12) ; *.J4_9 859.45,702.32 859.45,630.03 v1(859.63,629.84)
  Bottom Layer w10: v1(305.14,288.62) 358.62,288.62 699.84,629.84 v1(859.63,629.84) ; J1.53 v1(319.88,-30.12) v1@320,-30
SD1_DATA0: *.J4_7 J1.49 | length 1177.5
  Top Layer w10: v1(445.87,-30.87) 445.87,387.58 491.96,433.68 618.68,433.68 761.63,576.63 926.63,576.63 953.76,603.76 *.J4_7
  Bottom Layer w10: v1@445,-30 v1(445.87,-30.87) J1.49
SD1_DATA1: *.J4_6 J1.50 | length 1377.5
  Top Layer w10: v1(415,-165) 445,-165 475,-135 475,372 516.68,413.68 633.68,413.68 773.48,553.48 958.48,553.48 1001,596 *.J4_6
  Bottom Layer w10: J1.50 414.69,-92.83 414.69,-164.68 v1(415,-165)
SD1_DATA2: *.J4_11 J1.52 | length 1067.4
  Top Layer w10: v1(350.69,-30.69) 350.69,400.69 430.22,480.22 600.22,480.22 764.78,644.78 *.J4_11
  Bottom Layer w10: v1@350,-30 v1(350.69,-30.69) 351.38,-31.38 J1.52
SD1_DATA3: *.J4_10 J1.51 | length 1069.5
  Top Layer w10: v1(382.87,-32.13) 382.87,387.87 448.68,453.68 608.68,453.68 808.99,653.99 808.99,699.46 *.J4_10
  Bottom Layer w10: J1.51 v1(382.87,-32.13) v1@385,-30
SD1_nRST: *.J1_22 J2.15 | length 1375.8
  Top Layer w10: v1(-295,-390) -294.07,-390.93 -236.02,-390.93 *.J1_22
  Bottom Layer w10: v1(-295,-390) -295,-435 -240,-490 -215,-490 319.2,-1024.2 319.2,-1064.2 540.35,-1285.35 J2.15
SNVS_TAMPER0: *.J1_3 J2.6 | length 3978.5
  Top Layer w10: v1(-472.92,741.67) -788.33,741.67 -835,695 -835,-1180 -775.16,-1239.84 -164.71,-1239.84 -150.16,-1225.29 -150.16,-1197.66 v1(-136.92,-1184.41) ; v1(-470,505) -469.21,505.79 *.J1_3
  Bottom Layer w10: v1(-472.92,741.67) -471.46,740.21 -471.46,506.46 v1(-470,505) ; v1(-136.92,-1184.41) 142.7,-1184.41 256.89,-1298.61 J2.6
SNVS_TAMPER1: *.J4_30 J2.5 | length 3639.5
  Top Layer w10: v1(-175,-1215) -745,-1215 -805,-1155 -805,655 -757.5,702.5 *.J4_30
  Bottom Layer w10: v1(-175,-1215) 145,-1215 225.39,-1295.39 J2.5
SNVS_TAMPER2: *.J1_8 J2.12 | length 2779.7
  Top Layer w10: *.J1_8 -525.43,269.57 -625,170 -625,-885 -535,-975 v1(-175,-975)
  Bottom Layer w10: v1(-175,-975) 131.65,-975 445.87,-1289.21 J2.12
SNVS_TAMPER3: *.J1_6
SNVS_TAMPER4: *.J4_29 J2.3 | length 3918.8
  Top Layer w10: v1(-175,-1290) -780,-1290 -865,-1205 -865,740 -825,780 -100,780 -85.61,765.61 *.J4_29
  Bottom Layer w10: v1(-175,-1290) 148.15,-1290 161.74,-1303.59 161.74,-1343.82 J2.3
SNVS_TAMPER5: *.J4_27 J2.11 | length 3380
  Top Layer w10: v1(-628.67,251.33) -655,225 -655,-920 -560,-1015 v1(-175,-1015) ; *.J4_27 10,703.63 v1(10,770)
  Bottom Layer w10: v1(-628.67,251.33) -508.67,251.33 v1(10,770) ; v1(-175,-1015) 137.91,-1015 414.37,-1291.46 J2.11
SNVS_TAMPER6: *.J1_7 J1.39 | length 1850.3
  Top Layer w10: *.J1_7 -128.32,316.81 -111.51,300 v1(-110,300)
  Bottom Layer w10: v1(-110,300) -85,275 -85,-260 25,-370 725,-370 760.83,-334.17 J1.39
SNVS_TAMPER7: *.J1_5 J2.10 | length 2992.4
  Top Layer w10: *.J1_5 -538.7,411.3 -685,265 -685,-960 -594.34,-1050.66 v1(-136.92,-1050.66)
  Bottom Layer w10: v1(-136.92,-1050.66) 139.83,-1050.66 382.87,-1293.71 J2.10
SNVS_TAMPER8: *.J1_4 J2.9 | length 3091.3
  Top Layer w10: *.J1_4 -556.46,458.54 -715,300 -715,-1005 -635,-1085 v1(-175,-1085)
  Bottom Layer w10: v1@-180,-1085 v1(-175,-1085) 140.87,-1085 351.38,-1295.51 J2.9
SNVS_TAMPER9: *.J4_24 J1.48 | length 1869.3
  Top Layer w10: v1(150,640) 150.3,640.3 150.3,702.2 *.J4_24
  Bottom Layer w10: v1(150,640) -35,640 -60,615 -60,-250 -30,-280 450,-280 477.36,-252.64 J1.48
SYS_3V3: *.J4_3 *.J4_4 C3.2 C4.2 SW1.1 SW2.1 V1.2 | length 6751
  Top Layer w30: V1.2@-255,-1530 -495,-1530 -505.17,-1540.17 -505.17,-1724.83 -455.17,-1774.83 1505.17,-1774.83 1639.83,-1640.17 1639.83,-1500 ; SW1.1 615,940 1127.43,940 1145,922.43 1145,887.22 C4.2 ; *.J4_4 *.J4_3 1142.73,726.38 1142.24,726.87 C3.2@1142.24,802.69 ; C3.2@1142.24,803.67 C4.2 ; SW2.1 1629.83,-1490 1639.83,-1500 ; C4.2 1505.54,884.46 1639.83,750.17 1639.83,-1500
UART1_CTS: *.J2_3 J2.48 | length 1124
  Top Layer w10: *.J2_3 -38.22,-1266.78 310,-1615 450,-1615 v1(475,-1590)
  Bottom Layer w10: v1(475,-1590) 476.18,-1588.82 476.18,-1530.71 J2.48
UART1_RTS: *.J2_5 J2.43 | length 1110.3
  Top Layer w10: *.J2_5 56.27,-1256.27 180,-1380 543.86,-1380 633.97,-1470.11 v1(633.97,-1471.86)
  Bottom Layer w10: v1(633.97,-1471.86) 634.41,-1472.29 634.41,-1529.09 J2.43
UART1_RXD: *.J2_2 J2.46 | length 1262.6
  Top Layer w10: *.J2_2 -85.46,-1264.54 290,-1640 505,-1640 v1@539.31,-1605.69
  Bottom Layer w10: v1(540,-1605) 540.18,-1604.82 540.18,-1529.7 J2.46
UART1_TXD: *.J2_4 J2.50 | length 986.6
  Top Layer w10: *.J2_4 9.03,-1264.03 330,-1585 v1(415,-1585)
  Bottom Layer w10: J2.50 414.69,-1529.84 414.69,-1584.69 v1(415,-1585)
UART2_CTS: *.J2_8 J2.39 | length 1148.3
  Top Layer w10: *.J2_8 198,-1258 260,-1320 670,-1320 699.04,-1349.04 699.04,-1429.04 710,-1440 728.15,-1458.15 758.15,-1458.15 v1(760,-1460)
  Bottom Layer w10: v1(760,-1460) 760.83,-1460.83 J2.39
UART2_RTS: *.J2_9 J2.40 | length 1093.4
  Top Layer w10: *.J2_9 245.25,-1240.25 305,-1300 705,-1300 730.72,-1325.72 v1(730.72,-1405.31)
  Bottom Layer w10: J2.40 730.02,-1528.84 730.02,-1406.01 v1(730.72,-1405.31)
UART2_RXD: *.J2_6 J2.41 | length 1127.1
  Top Layer w10: *.J2_6 103.51,-1258.51 205,-1360 570,-1360 682.84,-1472.84 v1(698.43,-1472.84)
  Bottom Layer w10: J2.41 698.13,-1529.23 698.13,-1473.14 v1(698.43,-1472.84)
UART2_TXD: *.J2_7 J2.42 | length 1085.7
  Top Layer w10: *.J2_7 150.76,-1255.76 235,-1340 599.96,-1340 v1(667.36,-1407.4)
  Bottom Layer w10: J2.42 666.85,-1529.02 666.85,-1407.91 v1(667.36,-1407.4)
UART3_CTS: *.J2_12 J2.36 | length 1082.8
  Top Layer w10: *.J2_12 386.98,-1211.98 415,-1240 810,-1240 855,-1285 v1(855,-1430)
  Bottom Layer w10: v1(855,-1430) 855.31,-1430.31 J2.36
UART3_RTS: *.J2_13 J2.35 | length 1073.4
  Top Layer w10: *.J2_13 434.22,-1199.22 455,-1220 845,-1220 886.81,-1261.81 v1(886.81,-1461.81)
  Bottom Layer w10: J2.35 v1(886.81,-1461.81)
UART3_RXD: *.J2_11 J2.37 | length 1093.3
  Top Layer w10: *.J2_11 339.74,-1219.74 380,-1260 780,-1260 825,-1305 v1(825,-1460)
  Bottom Layer w10: J2.37 825,-1528.35 v1(825,-1460)
UART3_TXD: *.J2_10 J2.38 | length 1101.7
  Top Layer w10: *.J2_10 292.49,-1227.49 345,-1280 750,-1280 792.32,-1322.32 v1(792.32,-1432.32)
  Bottom Layer w10: J2.38 v1(792.32,-1432.32)
USB_OTG1_D_N: *.J1_13 J2.53 | length 3172.1
  Top Layer w10: v1(-535,35) -534.17,34.17 -235.92,34.17 *.J1_13
  Bottom Layer w10: v1(-535,35) -535,-525 -615,-605 -615,-1695 -570,-1740 225,-1740 319.88,-1645.12 J2.53
USB_OTG1_D_P: *.J1_14 J2.54 | length 2967.1
  Top Layer w10: v1(-490,-15) -489.45,-14.45 -235.65,-14.45 *.J1_14
  Bottom Layer w10: v1(-490,-15) -490,-530 -580,-620 -580,-1665 -535,-1710 215,-1710 288.39,-1636.61 J2.54
USB_OTG1_ID: *.J1_15 J2.51 | length 3248.9
  Top Layer w10: v1(-585,-60) -584.43,-60.57 -235.67,-60.57 *.J1_15
  Bottom Layer w10: v1(-585,-60) -585,-530 -650,-595 -650,-1715 -590,-1775 235,-1775 382.87,-1627.13 J2.51
USB_OTG1_OC: *.J1_29 J2.49 | length 1824.3
  Top Layer w10: v1(-378.62,-723.69) -378.05,-723.13 -235.66,-723.13 *.J1_29
  Bottom Layer w10: v1(-378.62,-723.69) -415,-760.08 -415,-1450 -370,-1495 55,-1495 75,-1475 440.01,-1475 445.87,-1480.86 J2.49
USB_OTG1_PWR: *.J1_24 J2.14 | length 1286.7
  Top Layer w10: v1(-303.66,-486.34) *.J1_24
  Bottom Layer w10: v1(-303.66,-486.34) -121.68,-668.32 -81.68,-668.32 292.22,-1042.22 292.22,-1072.22 508.86,-1288.86 J2.14
USB_OTG1_VBUS: *.J1_12 J2.57 | length 2626.8
  Top Layer w10: v1(-374.74,80.77) v1@-374.66,80.68 ; *.J1_12@-235.19,80.68 *.J1_12
  Top Layer w20: v1@-374.66,80.68 *.J1_12@-235.19,80.68
  Bottom Layer w20: v1(-374.74,80.77) -374.19,80.21 -374.19,-584.19 -475,-685 -475,-1580 -415,-1640 160,-1640 193.9,-1606.1 J2.57
USB_OTG2_D_N: *.J1_9 J2.55 | length 3057.2
  Top Layer w10: v1(-450,225) -448.66,223.66 -236.43,223.66 *.J1_9
  Bottom Layer w10: v1(-450,225) -450,-545 -545,-640 -545,-1630 -490,-1685 200,-1685 256.89,-1628.11 J2.55
USB_OTG2_D_P: *.J1_10 J2.56 | length 2853.8
  Top Layer w10: v1(-395,175) -394.96,175.04 -235.14,175.04 *.J1_10
  Bottom Layer w10: v1(-395,175) -395,172.38 -411.95,155.43 -411.95,-561.95 -510,-660 -510,-1600 -445,-1665 180,-1665 225.39,-1619.61 J2.56
USB_OTG2_OC: *.J1_30 J2.47 | length 1783.6
  Top Layer w10: v1(-379.26,-770.88) -378.72,-770.34 -235.63,-770.34 *.J1_30
  Bottom Layer w10: v1(-379.26,-770.88) -379.26,-1425.74 -333.96,-1471.04 48.96,-1471.04 70,-1450 490,-1450 508.86,-1468.86 J2.47
USB_OTG2_PWR: *.J1_28 J2.13 | length 1024
  Bottom Layer w10: v1(-235.1,-675.31) -205.41,-705 -103.43,-705 477.36,-1285.79 J2.13
USB_OTG2_VBUS: *.J1_11 J2.58 | length 2527.1
  Top Layer w10: v1(-339.54,127.46) v1@-339.36,127.65 ; *.J1_11@-235.28,127.65 *.J1_11
  Top Layer w20: v1@-339.36,127.65 *.J1_11@-235.28,127.65
  Bottom Layer w20: v1(-339.54,127.46) -340,127.01 -340,-595 -440,-695 -440,-1560 -390,-1610 145,-1610 162.4,-1592.6 J2.58
VDD_COIN_3V: *.J2_1 J1.42 | length 1339
  Top Layer w10: *.J2_1 -132.71,-707.71 -10,-585 380,-585 v1(655,-310)
  Bottom Layer w10: v1(655,-310) 655,-307.38 666.34,-296.04 J1.42
VDDA_ADC_3V3: *.J2_14 SW2.2 | length 1202.5
  Top Layer w30: *.J2_14 481.47,-1106.47 565,-1190 SW2.2
pads on no net: J2.31 J2.32 J2.33 J2.34 J2.52

## Polygon pours and split planes (outlines as drawn)
GND on Top Layer "GND_L01_P000" (solid, remove dead copper, pour order 0): -975,-1835 -975,965 -960,980 1695,980 1705,970 1705,-1835 1675,-1865 -945,-1865
GND on Bottom Layer "GND_L02_P001" (solid, remove dead copper, pour order 1): -975,-1835 -975,965 -960,980 1695,980 1705,970 1705,-1835 1675,-1865 -945,-1865

## Keep-outs
Keep-Out Layer:
  circle w5: c0,0 r16.54
  circle w5: c1112.2,0 r23.8
  circle w5: c0,-1437.01 r16.54
  circle w5: c1112.2,-1437.01 r23.8
  lines w10: -975,-1835 -975,965 -960,980 1695,980 1705,970 1705,-1835 1675,-1865 -945,-1865 -975,-1835

## Other copper
Top Layer:
  pour cut-out: -156.76,-1182.63 -164.13,-1190 -740,-1190 -795,-1135 -789.08,-1129.08 -789.08,-1098.29 -783.34,-1098.29 -714.81,-1166.82 -186.24,-1166.82
  pour cut-out: 630.02,-1491.7 559.84,-1561.88 559.84,-1601.05 366.05,-1601.05 24.32,-1259.32 24.32,-921.44 40.98,-921.44 42.14,-922.6 42.14,-1263.77 173.67,-1395.29 540.29,-1395.29 605,-1460
  pour cut-out: 170,-40 165,-40 165,363.62 160.09,368.52 145.29,353.72 145.29,-17.44
  pour cut-out: 468.51,438.38 455.01,438.38 398.17,381.54 402.72,376.99 402.72,-36.07 424.76,-36.07 426.02,-34.81 425,-33.79 425,395 445,415
Bottom Layer:
  pour cut-out: 1029.69,-68.44 1031.6,-66.53 1034.3,-66.53 1051.92,-84.14 1051.92,-496.02 1110,-554.11 1110,-580 1085.14,-580 1078.22,-586.91 1011.27,-519.96 1018.1,-519.96 1031.82,-506.24 1030,-504.42 1030,-68.76
  pour cut-out: 1175.97,-645.99 1029.36,-645.99 938.99,-555.62 933.6,-561.01 933.6,-578.6 943.54,-588.54 907.11,-588.54 907.11,-600.48 902.11,-605.48 956.63,-660 1189.98,-660
  pour cut-out: 1023.61,-1051.98 1025,-1050.59 1025,-790 845,-790 777.03,-722.03 777.03,-349.41 772.03,-344.41 726.78,-389.65 21.28,-389.65 515,-883.37 515,-920 854.1,-920 885.16,-951.05

## Silkscreen, mask and mechanical layers (free items; w line width, h text height)
Top Overlay:
  text "上电前确保SW1,SW2断开，直至IMX完成上电（上电时序）" at -803.71,-1787.33 h100

## Text inside footprints (layer, text, board x,y; h text height)
SW1: Top Overlay "ON" at 755,900 h60 r270
SW2: Top Overlay "ON" at 1375,-1270 h60